# EAGLE board WiFi_Board_R1_0 (EAGLE 6.6.0)
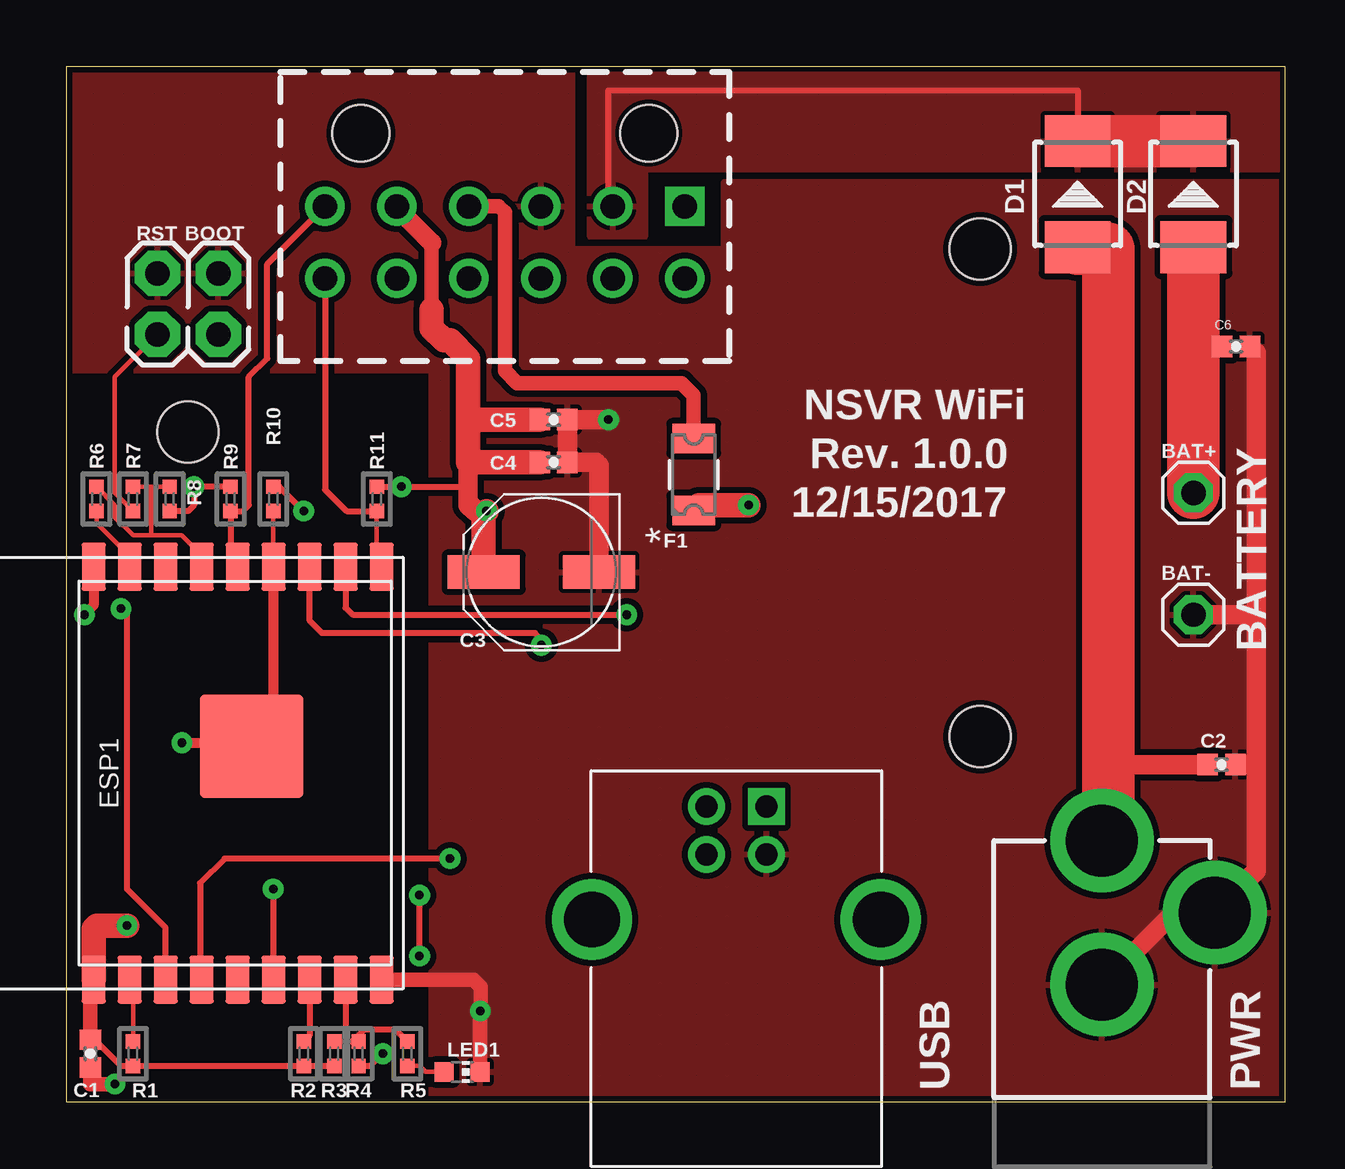
[diagram p0: board, top side]
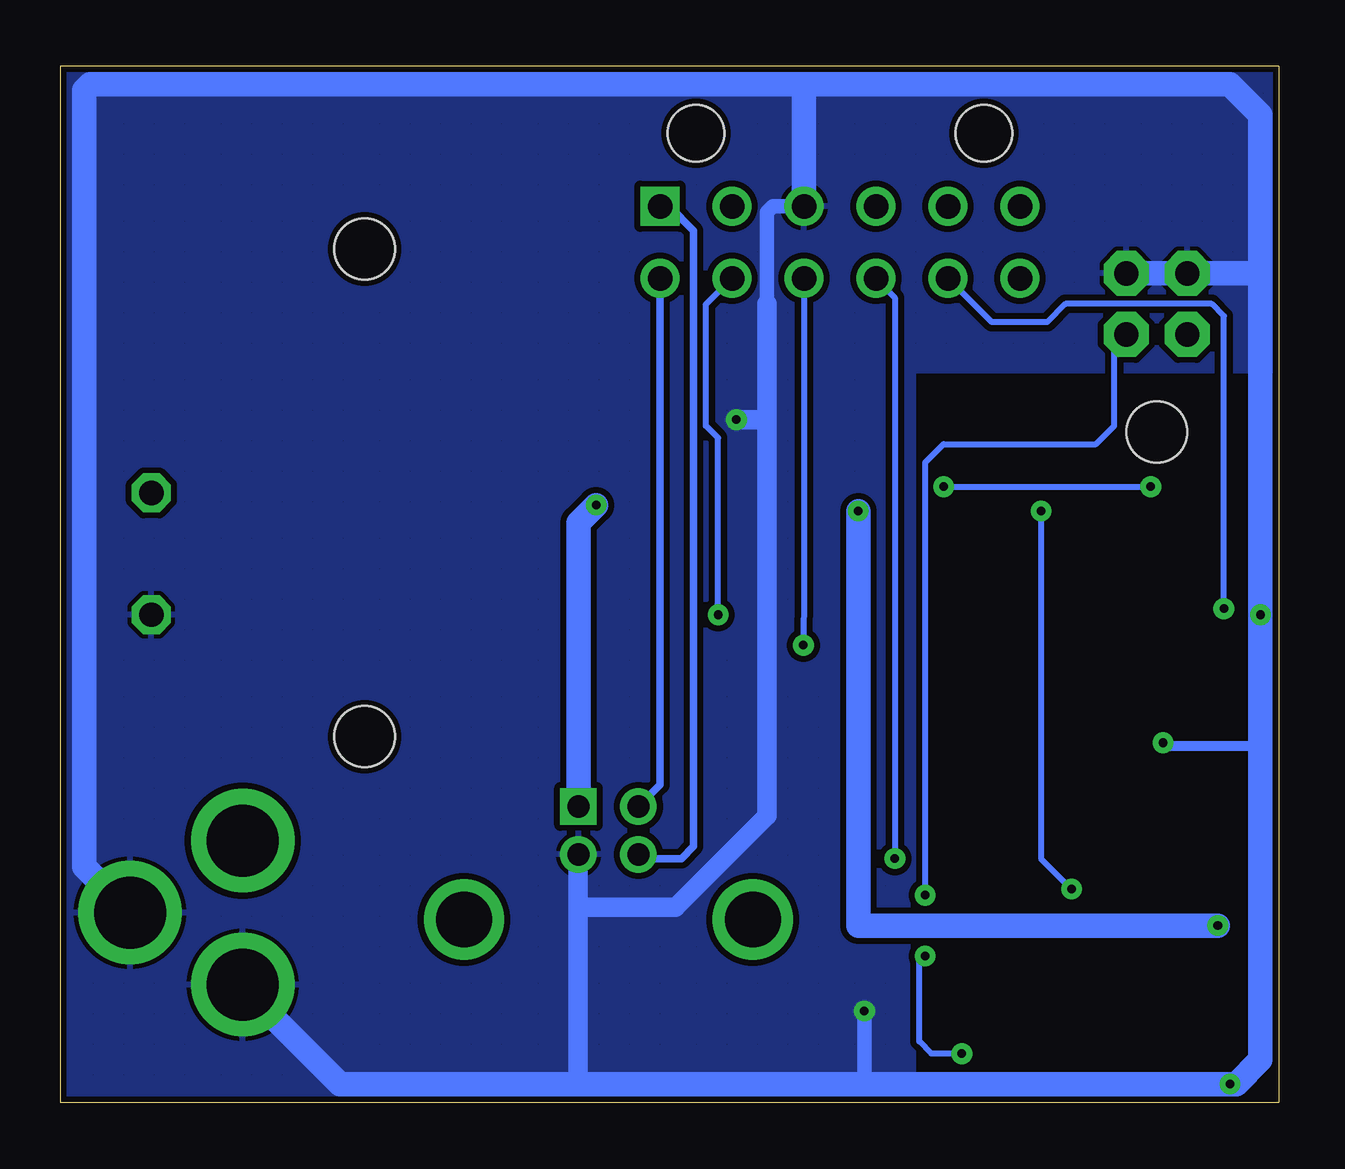
[diagram p1: board, bottom side, seen from below]

Size 50.8 x 43.18 mm. Coordinates in mm from the lower left corner, seen from the top.
Outline: 0,43.18 0,0 50.8,0 50.8,43.18 0,43.18
Copper layers (1*16): Top 0.035mm / dielectric 1.5mm / Bottom 0.035mm
Design rules "PatternAgents_7mil": minimum track width 7mil, minimum drill 14mil, track to track 7mil, track to pad 7mil, pad to pad 7mil, via to via 7mil, smd to smd 7mil, copper to edge 7mil, drill to drill 7mil, minimum pad ring 12mil, minimum via ring 10mil, stop-mask expansion 4mil, vias tented up to drill 25mil, thermal gap 7mil
Holes 2.54 mm at 38.1,35.56 5.08,27.94 38.1,15.24

## Footprints (pad centres in the part's own frame; a part is rotated, then mirrored left to right if it is on the bottom)
WPAD-1-PTH-2.54 = drill 1.016 octagon: 1 0,0
JMP-2-NO-PTH-2.54 = drill 1.016 pad 1.88 octagon: 1 0,0; 2 2.54,0
0402-CAP = smd 0.85 x 0.9: 1 -0.58,0; 2 0.58,0
PANASONIC_D = smd 3 x 1.4: + 2.4,0; - -2.4,0
DO-214AA = smd 2.159 x 2.743: + -2.21,0; - 2.21,0
ESP-WROOM02 = smd 2 x 1: 1 -8.6,1.9; 2 -8.6,0.4; 3 -8.6,-1.1; 4 -8.6,-2.6; 5 -8.6,-4.1; 6 -8.6,-5.6; 7 -8.6,-7.1; 8 -8.6,-8.6; 9 -8.6,-10.1; 10 8.6,-10.1; 11 8.6,-8.6; 12 8.6,-7.1; 13 8.6,-5.6; 14 8.6,-4.1; 15 8.6,-2.6; 16 8.6,-1.1; 17 8.6,0.4; 18 8.6,1.9 | smd 4.3 x 4.3: TP 1.12,-4.68
1206LSERIES = smd 1.219 x 1.778: 1 -1.499,0; 2 1.499,0
CHIP-LED0603 = smd 0.8 x 0.8: A 0,-0.75; C 0,0.75
POWER_JACK_PTH = drill 2.997 pad 4.318: GND 0,7.7; GNDBREAK 4.7,10.7; PWR 0,13.7
OST_USB-B1HSB6 = drill 0.92 square: 1 1.25,4.71 | drill 0.92: 2 -1.25,4.71; 3 -1.25,2.71; 4 1.25,2.71 | drill 2.33: P1 -6.02,0; P2 6.02,0
44764-1201 = drill 1.02 square: P$1 -7.5,0 | drill 1.02: P$2 -4.5,0; P$3 -1.5,0; P$4 1.5,0; P$5 4.5,0; P$6 7.5,0; P$7 -7.5,3; P$8 -4.5,3; P$9 -1.5,3; P$10 1.5,3; P$11 4.5,3; P$12 7.5,3 | hole 2.36: -6,-3.05; 6,-3.05
EIA-0402 = smd 0.6 x 0.6: 1 -0.508,0; 2 0.508,0

## Placement (x,y rotation side)
BAT+  [WPAD-1-PTH-2.54]  46.99,25.4 0 top
BAT-  [WPAD-1-PTH-2.54]  46.99,20.32 0 top
BOOT  [JMP-2-NO-PTH-2.54]  6.35,32 90 top
C1  100n  [0402-CAP]  1.02,2.03 90 top
C2  1uF  [0402-CAP]  48.16,14.07 0 top
C3  47u  [PANASONIC_D]  19.81,22.1 180 top
C4  1uF  [0402-CAP]  20.32,26.67 0 top
C5  0.1uF  [0402-CAP]  20.32,28.45 0 top
C6  1uF  [0402-CAP]  48.77,31.5 0 top
D1  28V-5A  [DO-214AA]  42.16,37.85 90 top
D2  28V-5A  [DO-214AA]  46.99,37.85 90 top
ESP1  ESP-WROOM02  [ESP-WROOM02]  3.05,13.72 90 top
F1  1206L050YR  [1206LSERIES]  26.16,26.16 90 top
LED1  [CHIP-LED0603]  16.51,1.27 270 top
P1  POWER_JACKPTH  [POWER_JACK_PTH]  43.18,-2.79 0 top
P2  USB-B1HSB6  [OST_USB-B1HSB6]  27.94,7.62 0 top
P3  44764-1201  [44764-1201]  18.29,37.34 180 top
R1  10k  [EIA-0402]  2.79,2.03 270 top
R2  10k  [EIA-0402]  9.91,2.03 270 top
R3  10k  [EIA-0402]  11.18,2.03 270 top
R4  220  [EIA-0402]  12.19,2.03 270 top
R5  1k  [EIA-0402]  14.22,2.03 270 top
R6  10k  [EIA-0402]  1.27,25.15 270 top
R7  220  [EIA-0402]  2.79,25.15 270 top
R8  10k  [EIA-0402]  4.32,25.15 270 top
R9  4k7  [EIA-0402]  6.86,25.15 90 top
R10  10k  [EIA-0402]  8.64,25.15 90 top
R11  4k7  [EIA-0402]  12.95,25.15 90 top
RST  [JMP-2-NO-PTH-2.54]  3.81,32 90 top

## Library data of the parts
BAT+ BAT- BOOT RST = PatternAgents-ProtoPads; BOM: EXCLUDE
C1 C2 C4-C6 R1-R11 = PatternAgents-ProtoPads
C3 = SparkFun-Capacitors
D1 D2 = Seeed-Diode-2016; MPN: SS54B
ESP1 = we-chip
F1 = 1206L050; COPYRIGHT: Copyright C 2015 Accelerated Designs. All rights reserved; MANUFACTURER_PART_NUMBER: 1206L050YR; VENDOR: Littelfuse Inc
LED1 = led
P1 = SparkFun-Connectors; PROD_ID: CONN-08197
P2 = USB-B1HSB6; AVAILABILITY: Warning; DESCRIPTION: Conn Usb Type b r/a Black; MF: On Shore Technology; MP: USB-B1HSB6; PACKAGE: None; PRICE: 0.42 USD
P3 = nsvr

## Nets
3V3_EXT: C1.2 C3.+ C4.1 C5.1 ESP1.1 P3.P$5 R1.2 R2.2 R3.2 R8.2 R9.2 R11.2
5V0: F1.2 P3.P$4
!RST: ESP1.15 R6.1 R7.1 R8.1
CTS0: ESP1.4 P3.P$10
EN: ESP1.2 R1.1
GND: BAT-.1 BOOT.2 C1.1 C2.2 C3.- C4.2 C5.2 C6.2 ESP1.9 ESP1.13 ESP1.18 ESP1.TP LED1.C P1.GND P1.GNDBREAK P2.4 P3.P$3 R10.1 RST.2
I2C_SCL: ESP1.14 P3.P$6 R9.1
I2C_SDA: ESP1.10 P3.P$12 R11.1
IO0: ESP1.8 R3.1 R4.1 R5.1
IO2: ESP1.7 R2.1
IO13: ESP1.5
IO15: ESP1.6 R10.2
IO16: ESP1.17 R6.2
LED1: LED1.A R5.2
N$1: R7.2 RST.1
N$2: BOOT.1 R4.2
RTS0: ESP1.3 P3.P$11
RXD0: ESP1.11 P3.P$8
TOUT: ESP1.16
TXD0: ESP1.12 P3.P$9
USB_DM: P2.2 P3.P$7
USB_DP: P2.3 P3.P$1
VBAT_DC: BAT+.1 C6.1 D2.+
VBUS_IN: F1.1 P2.1
VIN: D1.- D2.- P3.P$2
VIN_DC: C2.1 D1.+ P1.PWR

## Tracks (layer width: path | path; a pad name or v marks a point on that pad's centre or on a via)
3V3_EXT  (via drill 0.36)
  Top 0.254: R11.2 v13.97,25.65 16.51,25.65 v17.53,24.64 | R8.2 5.08,24.64 5.33,24.89 v5.33,25.65 R9.2 | C1.2 1.2,2.61 2.29,1.52 R1.2 R2.2 R3.2
  Top 0.61: 15.24,35.81 15.24,33.02 | C1.2 1.02,4.98 ESP1.1
  Top 0.813: P3.P$5 13.79,37.27 15.24,35.81 | 16.76,26.67 16.76,24.89 17.02,24.64 v17.53,24.64
  Top 1.016: 15.24,33.02 15.24,32.26 15.75,31.75 16,31.75 16.76,30.99 16.76,28.45 | 16.76,28.45 16.76,26.67 C4.1 | C5.1 16.76,28.45 | C3.+ 17.41,24.52 v17.53,24.64 | v2.54,7.37 1.27,7.37 1.15,7.24 ESP1.1
  Bottom 0.254: v13.97,25.65 v5.33,25.65
  Bottom 1.016: v17.53,24.64 17.53,7.37 v2.54,7.37
5V0
  Top 0.61: P3.P$4 18.03,37.34 18.29,37.08 18.29,30.48 18.8,29.97 25.65,29.97 26.16,29.46 F1.2
!RST
  Top 0.178: R8.1 3.56,25.65 | 3.56,25.65 R7.1 | R6.1 2.03,24.89 2.03,24.38 2.79,23.62 3.56,23.62 | 3.56,23.62 4.83,23.62 5.59,22.86 5.59,22.35 ESP1.15 | 3.56,23.62 3.56,25.65
CTS0  (via drill 0.36)
  Top 0.254: v16,10.16 6.6,10.16 5.59,9.14 5.59,5.18 ESP1.4
  Bottom 0.254: P3.P$10 16.79,34.31 16,33.53 v16,10.16
EN
  Top 0.178: R1.1 2.79,5.08 ESP1.2
GND  (via drill 0.36)
  Top 0.178: R10.1 8.64,22.35 ESP1.13
  Top 0.406: ESP1.18 1.15,20.71 v0.76,20.32 | 8.64,22.35 8.64,15.74 ESP1.TP 7.58,14.99 v4.83,14.99
  Top 0.61: C1.1 1.02,0.76 v2.03,0.76 | ESP1.9 16.98,5.12 17.27,4.83 v17.27,3.81 17.26,3.8 LED1.C
  Top 0.813: 49.02,14.07 C2.2 49.52,14.07 49.62,13.97 | 49.62,20.32 49.62,13.97 | 49.62,13.97 49.62,9.64 P1.GNDBREAK 46.18,7.91 P1.GND | BAT-.1 49.62,20.32 | 49.62,20.32 49.62,31.23 C6.2 | C3.- 22.21,26.56 22.1,26.67 C4.2 C5.2 v22.61,28.45
  Bottom 0.406: 0.76,14.48 1.12,14.84 4.93,14.84 v4.83,14.99
  Bottom 0.61: 21.34,33.27 21.34,37.08 21.08,37.34 P3.P$3 | v17.27,3.81 17.27,1.02 16.26,0.76
  Bottom 0.813: 21.34,33.27 21.34,28.19 | 21.34,28.19 21.34,11.94 25.15,8.13 29.21,8.13 | P2.4 29.21,10.31 29.21,8.13 | 29.21,8.13 29.21,1.02 29.46,0.76 | v22.61,28.45 21.59,28.45 21.34,28.19
  Bottom 1.016: 19.81,42.42 2.03,42.42 0.76,41.15 0.76,34.54 | 19.81,42.42 49.53,42.42 49.78,42.16 49.78,9.81 P1.GNDBREAK | 0.76,34.54 v0.76,20.32 0.76,14.48 0.76,1.78 1.78,0.76 v2.03,0.76 16.26,0.76 29.46,0.76 39.12,0.76 43.18,4.83 | P3.P$3 19.79,42.39 19.81,42.42 | BOOT.2 RST.2 0.76,34.54
  pour Bottom (isolate 0.254, hatched): 15.24,0 50.8,0 50.8,43.18 0,43.18 0,30.48 15.24,30.48
  pour Top (isolate 0.254, rank 2, hatched): 15.24,0 15.24,30.48 0,30.48 0,43.18 21.08,43.18 21.08,35.56 27.43,35.56 27.43,38.35 50.8,38.35 50.8,0
I2C_SCL
  Top 0.254: ESP1.14 6.86,22.61 R9.1 7.37,24.64 7.62,24.89 7.62,30.23 8.38,30.99 8.38,34.93 P3.P$6
I2C_SDA
  Top 0.178: R11.1 12.95,22.35 ESP1.10
  Top 0.254: P3.P$12 10.79,25.53 11.68,24.64 R11.1
IO0
  Top 0.254: R3.1 11.68,2.54 | 11.68,2.54 R4.1 12.19,2.79 12.45,3.05 13.72,3.05 R5.1 | ESP1.8 11.65,2.58 11.68,2.54
IO2
  Top 0.254: ESP1.7 10.15,2.78 R2.1
IO15  (via drill 0.36)
  Top 0.254: R10.2 8.89,25.65 v9.91,24.64 | v8.64,8.89 8.64,5.13 ESP1.6
  Bottom 0.254: v9.91,24.64 9.91,10.16 v8.64,8.89
IO16
  Top 0.178: R6.2 1.27,24.13 2.54,22.86 2.54,22.35 ESP1.17
LED1
  Top 0.178: R5.2 14.73,1.52 14.99,1.27 LED1.A
N$1
  Top 0.178: R7.2 2.03,25.4 2.03,30.23 RST.1
N$2  (via drill 0.36)
  Top 0.254: R4.2 12.7,1.52 v13.21,2.03 | v14.73,6.1 v14.73,8.64
  Bottom 0.254: v13.21,2.03 14.48,2.03 14.99,2.54 14.99,5.84 v14.73,6.1 | v14.73,8.64 14.73,26.67 13.97,27.43 7.62,27.43 6.86,28.19 6.86,31.5 BOOT.1
RTS0  (via drill 0.36)
  Top 0.254: ESP1.3 4.15,7.28 2.54,8.89 2.54,20.32 v2.29,20.57
  Bottom 0.254: v2.29,20.57 2.29,32.77 2.79,33.27 8.89,33.27 9.65,32.51 11.96,32.51 P3.P$11
RXD0  (via drill 0.36)
  Top 0.254: ESP1.11 11.65,20.61 11.94,20.32 v23.37,20.32
  Bottom 0.254: v23.37,20.32 23.37,27.69 23.88,28.19 23.88,33.25 P3.P$8
TXD0  (via drill 0.36)
  Top 0.254: v19.81,19.05 19.81,19.3 19.56,19.56 10.67,19.56 10.16,20.07 10.16,22.3 ESP1.12
  Bottom 0.254: P3.P$9 19.79,21.36 v19.81,19.05
USB_DM
  Bottom 0.305: P3.P$7 25.79,13.23 P2.2
USB_DP
  Bottom 0.305: P3.P$1 25.4,37.34 24.38,36.32 24.38,10.67 24.89,10.16 26.52,10.16 P2.3
VBAT_DC
  Top 0.813: C6.1 46.99,31.5
  Top 2.184: BAT+.1 46.99,31.5 D2.+
VBUS_IN  (via drill 0.36)
  Top 1.016: v28.45,24.89 26.39,24.89 F1.1
  Bottom 1.016: P2.1 29.19,24.15 v28.45,24.89
VIN
  Top 0.254: P3.P$2 22.61,37.34 22.61,42.16 42.16,42.16 D1.-
  Top 2.184: D2.- D1.-
  pour Top (isolate 0.203, rank 2, hatched): 24.13,36.07 21.84,36.07 21.84,42.93 50.55,42.93 50.55,38.86 24.13,38.86
VIN_DC
  Top 0.813: C2.1 43.43,14.07 43.43,14.22
  Top 2.184: P1.PWR 43.43,10.91 43.43,14.22 43.43,35.56 42.16,35.56 D1.+

## Text on the board
tPlace: NSVR WiFi | Rev. 1.0.0 | 12/15/2017 | F1 | BATTERY | USB | PWR